# Altium PCB TK104_Pulsbegrenser_Eurorack_frontpanel.PcbDoc
Units mm, origin at the board's own origin, x right, y up, seen from the top; angles counter-clockwise.
Board outline 20.3 x 128.5 mm, 2 copper layers (Top Layer, Bottom Layer), stack 1.871 mm thick; 1 components, 0 nets, 9 pads, 0 vias.
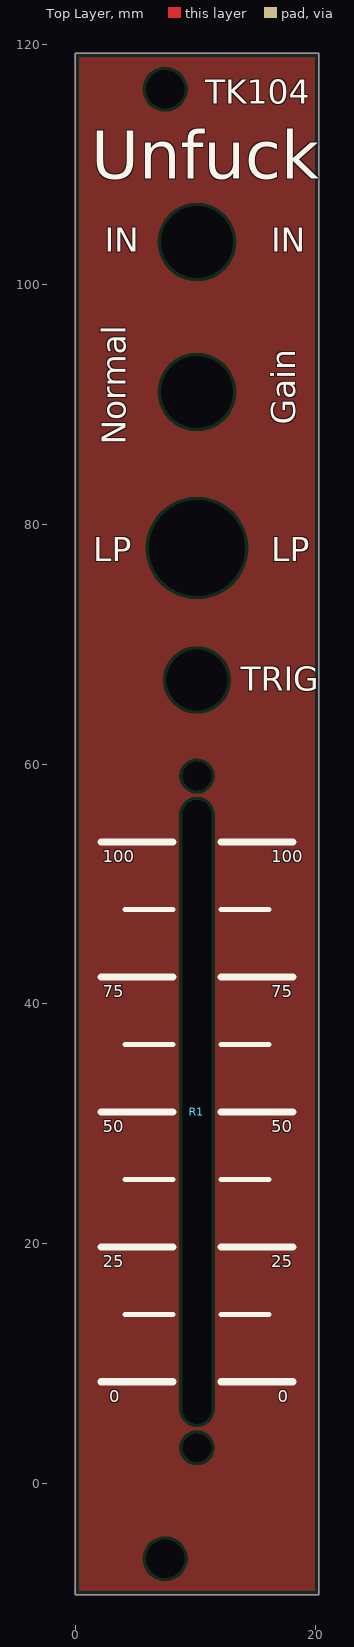
[diagram p0: Top Layer view]
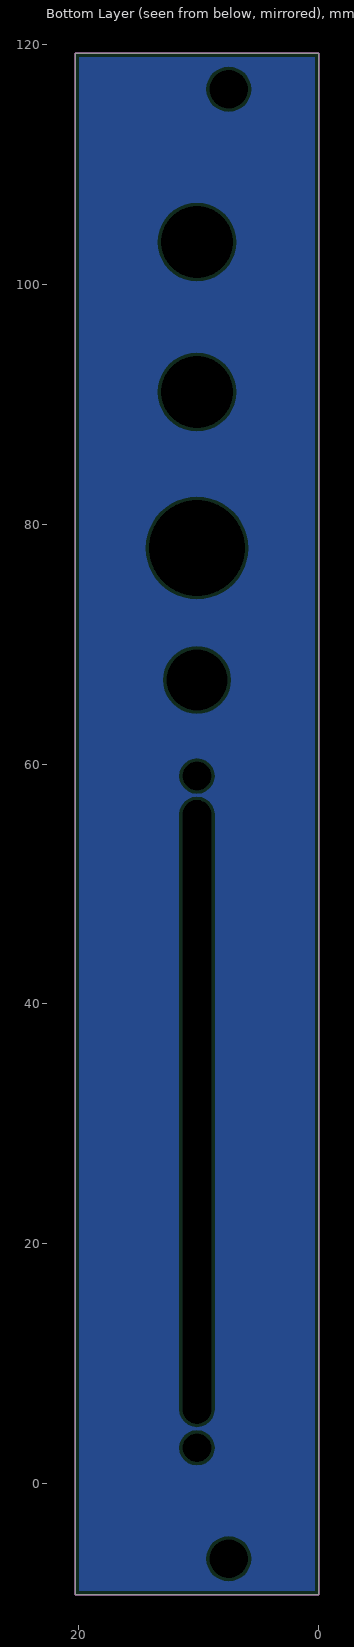
[diagram p1: Bottom Layer view, seen from below]

## Layer stack, top to bottom
Top Solder: solder mask 0.0102, Solder Resist, Dk 3.5
Top Layer: signal copper 0.0356
Dielectric 1: dielectric 1.8, FR-4, Dk 4.8
Bottom Layer: signal copper 0.0356
Bottom Solder: solder mask 0.0102, Solder Resist, Dk 3.5

## Board outline
0,-9.25 0,119.25 20.3,119.25 20.3,-9.25

## Design rules (kind name [scope] priority, off if disabled: settings)
Clearance [All] p1: gap=0.254 ignorepadtopadclearanceinfootprint=FALSE except(0: Arc-Hole Track-Hole SMDPad-Hole THPad-Hole Via-Hole Fill-Hole Poly-Hole Region-Hole Text-Hole)
HoleSize [All] p1: absolutevalues=TRUE maxlimit=100 minlimit=0.2 maxpercent=80.000 minpercent=20.000
PolygonConnect [All] p1: connectstyle=Relief reliefconductorwidth=0.5 reliefentries=4 polygonreliefangle="90 Angle" airgapwidth=0.254
RoutingVias [All] p1: holewidth=0.711 width=1.27 viastyle="Through Hole" minholewidth=0.711 minwidth=1.27 maxholewidth=0.711 maxwidth=1.27
SolderMaskExpansion [All] p1: expansion=0.102
Width [All] p1: maxlimit=600 minlimit=0.25 preferedwidth=0.4
29 further rules are at their usual default settings.

## Components (designator, comment, footprint, x,y, rotation, side; value= is the part's Value field where it differs from the comment)
R1 "=navn" PTA4543-PANEL 10.15,31 r270 top

## Footprints (in the part's own frame and the unit in brackets; to place one, negate y for a bottom-side part, rotate by r counter-clockwise, add the part's x,y. Pads: shape width x height; smd on the part's side, far side on the other; paste and mask are expansions set on the pad)
PTA4543-PANEL [mm] "Panel holes and slot for PTA4543"
  round 0 hole 2.4 unplated: 8(-28,0) 9(28,0)
  round 0 hole 2.4 slot 52 at 0 deg unplated: 10(0,0)
  silkscreen extent -22.5,-8 22.5,8, body extent -30,-4.65 30,4.65, height 14.5

## Part data
R1: library part Potmeter

## Free pads (board coordinates)
  round 0 hole 3.2 unplated: 4(7.5,-6.25) 4(7.5,116.25)
  round 0 hole 5.1 unplated: 4(10.15,67)
  round 0 hole 8 unplated: 4(10.15,78)
  round 0 hole 6 unplated: 4(10.15,91) 4(10.15,103.5)

## Nets (pads, with @x,y where several pads share a name; then routed paths per layer and width w, separated by ;. In a path a pad name is that pad's centre, name@x,y a point inside that pad or via, vN(x,y) a via of type N, cw(c..) or ccw(c..) an arc to the next point about the centre after c; other vN are vias at no path point)
pads on no net: R1.8 R1.9 R1.10

## Polygon pours and split planes (outlines as drawn)
no net on Top Layer "Top Layer-No Net" (solid, pour order 0): 0,-9.25 0,119.25 20.3,119.25 20.3,-9.25
no net on Bottom Layer "Bottom Layer-No Net" (solid, pour order 2): 0,-9.25 0,119.25 20.3,119.25 20.3,-9.25

## Keep-outs
Keep-Out Layer:
  the board outline again, w0.127

## Silkscreen, mask and mechanical layers (free items; w line width, h text height)
Top Overlay:
  text "TK104" at 10.85,115.05 h2
  text "Unfuck" at 1.35,108.8 h4
  text "IN" at 2.448,102.7 h2
  text "IN" at 16.35,102.7 h2
  text "Gain" at 18.35,88.3 h2 r90
  text "Normal" at 4.2,86.6 h2 r90
  text "LP" at 1.505,76.9 h2
  text "LP" at 16.35,76.9 h2
  text "TRIG" at 13.8,66.1 h2
Mechanical 1:
  the board outline again, w0.127

## Text inside footprints (layer, text, board x,y; h text height)
R1: Top Overlay "100" at 16.338,51.812 h1; Top Overlay "75" at 16.338,40.562 h1; Top Overlay "50" at 16.338,29.312 h1; Top Overlay "25" at 16.338,18.062 h1; Top Overlay "0" at 16.9,6.812 h1; Top Overlay "0" at 2.837,6.812 h1; Top Overlay "25" at 2.275,18.062 h1; Top Overlay "50" at 2.275,29.312 h1; Top Overlay "75" at 2.275,40.562 h1; Top Overlay "100" at 2.275,51.812 h1